# Altium PCB 水下机器人电调控制板2020.PcbDoc
Units mil, origin at the board's own origin, x right, y up, seen from the top; angles counter-clockwise.
Board outline 3149.61 x 2874.02 mil, 4 copper layers (Top Layer, AGND, SIGNAL, Bottom Layer), stack 23.756 mil thick; 78 components, 83 nets, 357 pads, 453 vias.
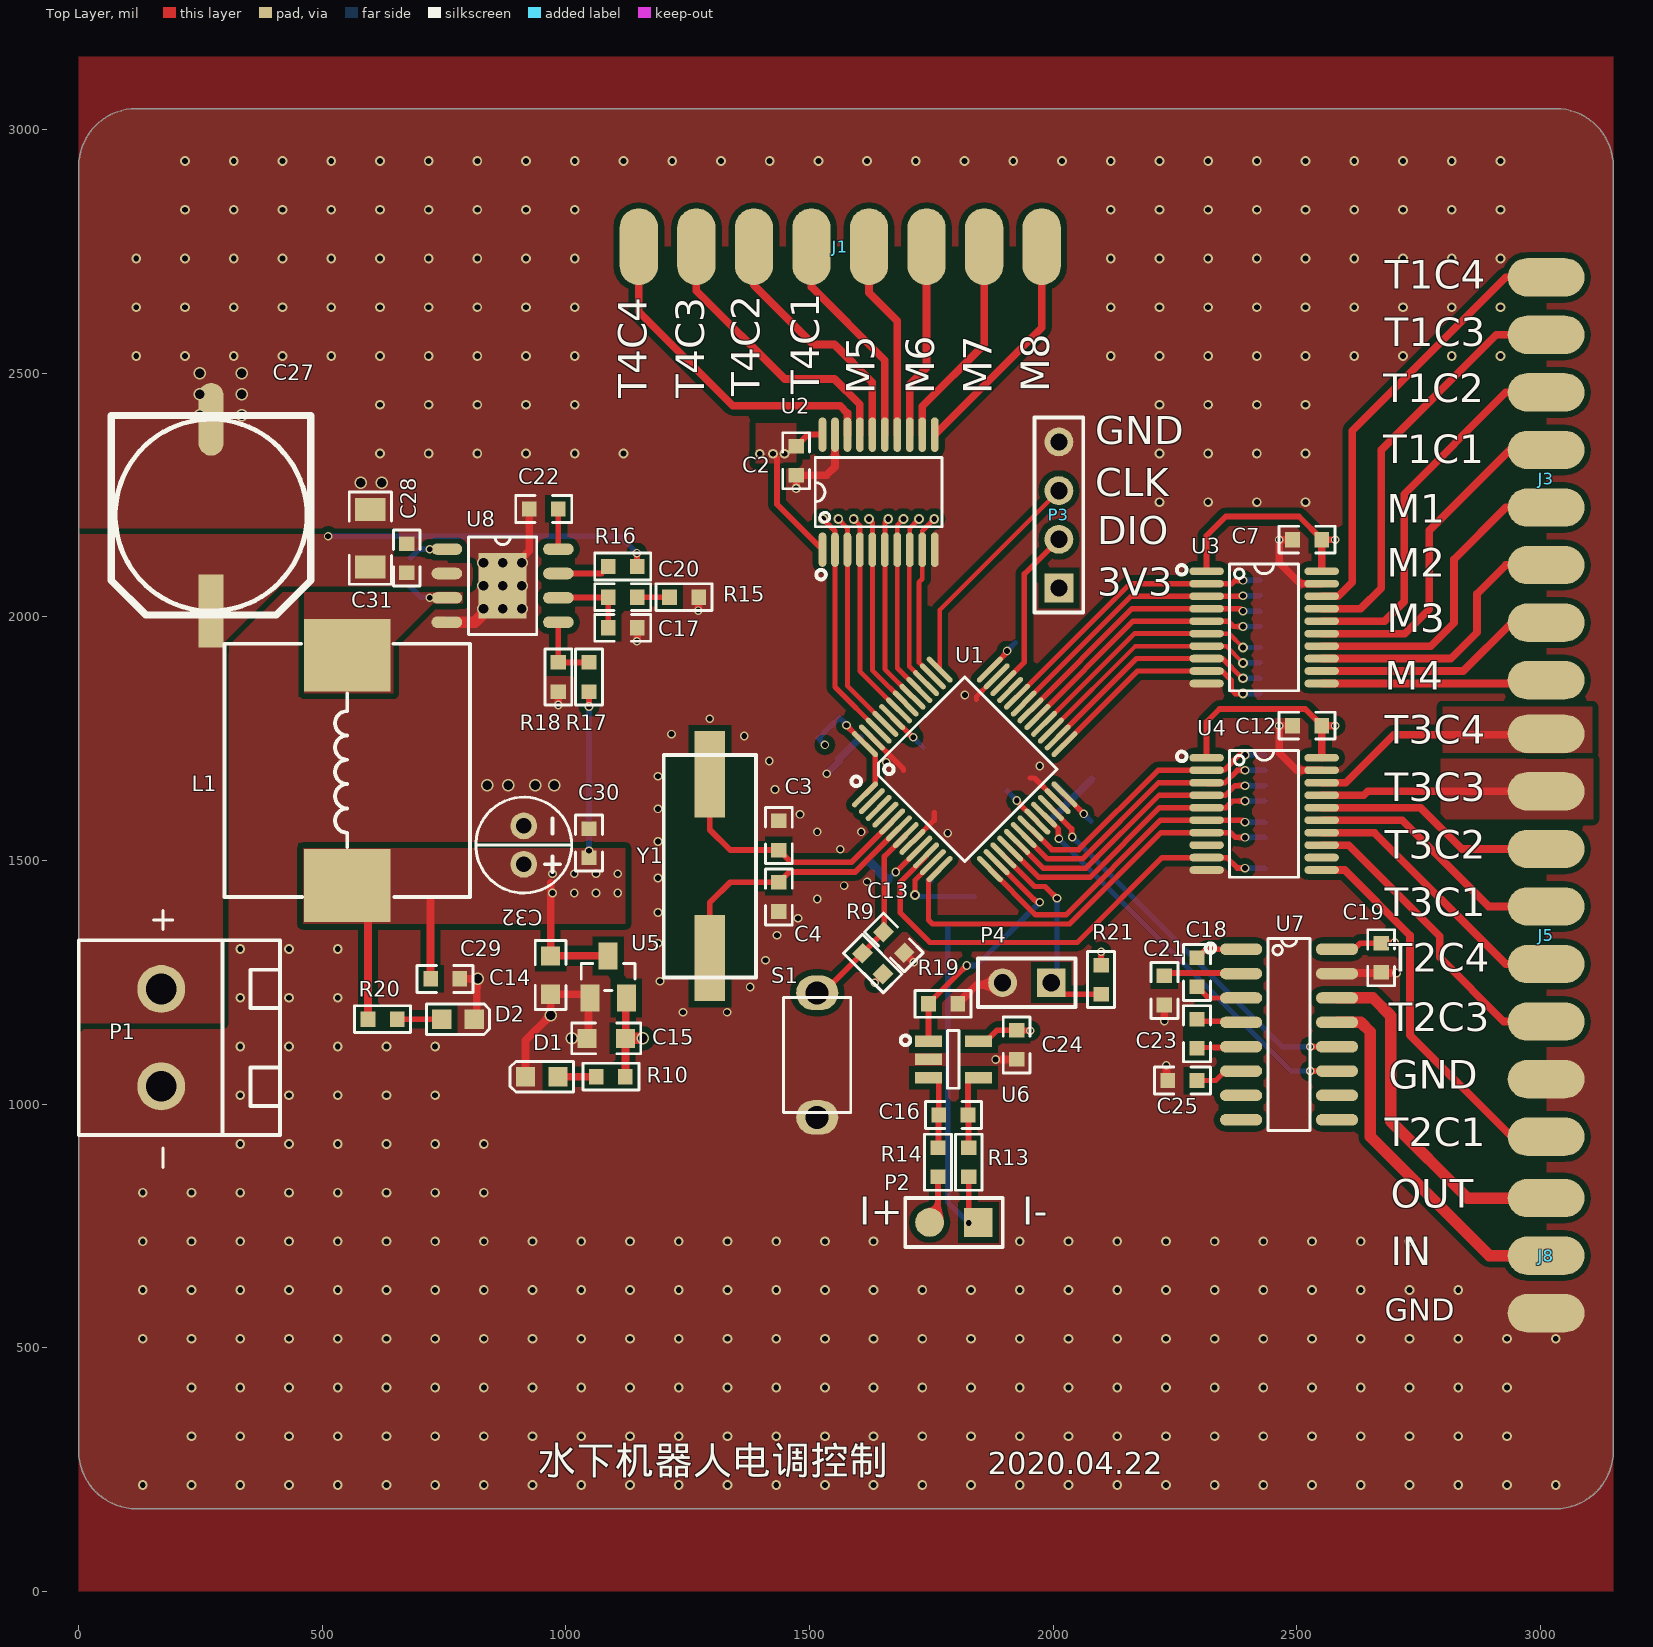
[diagram p0: Top Layer view]
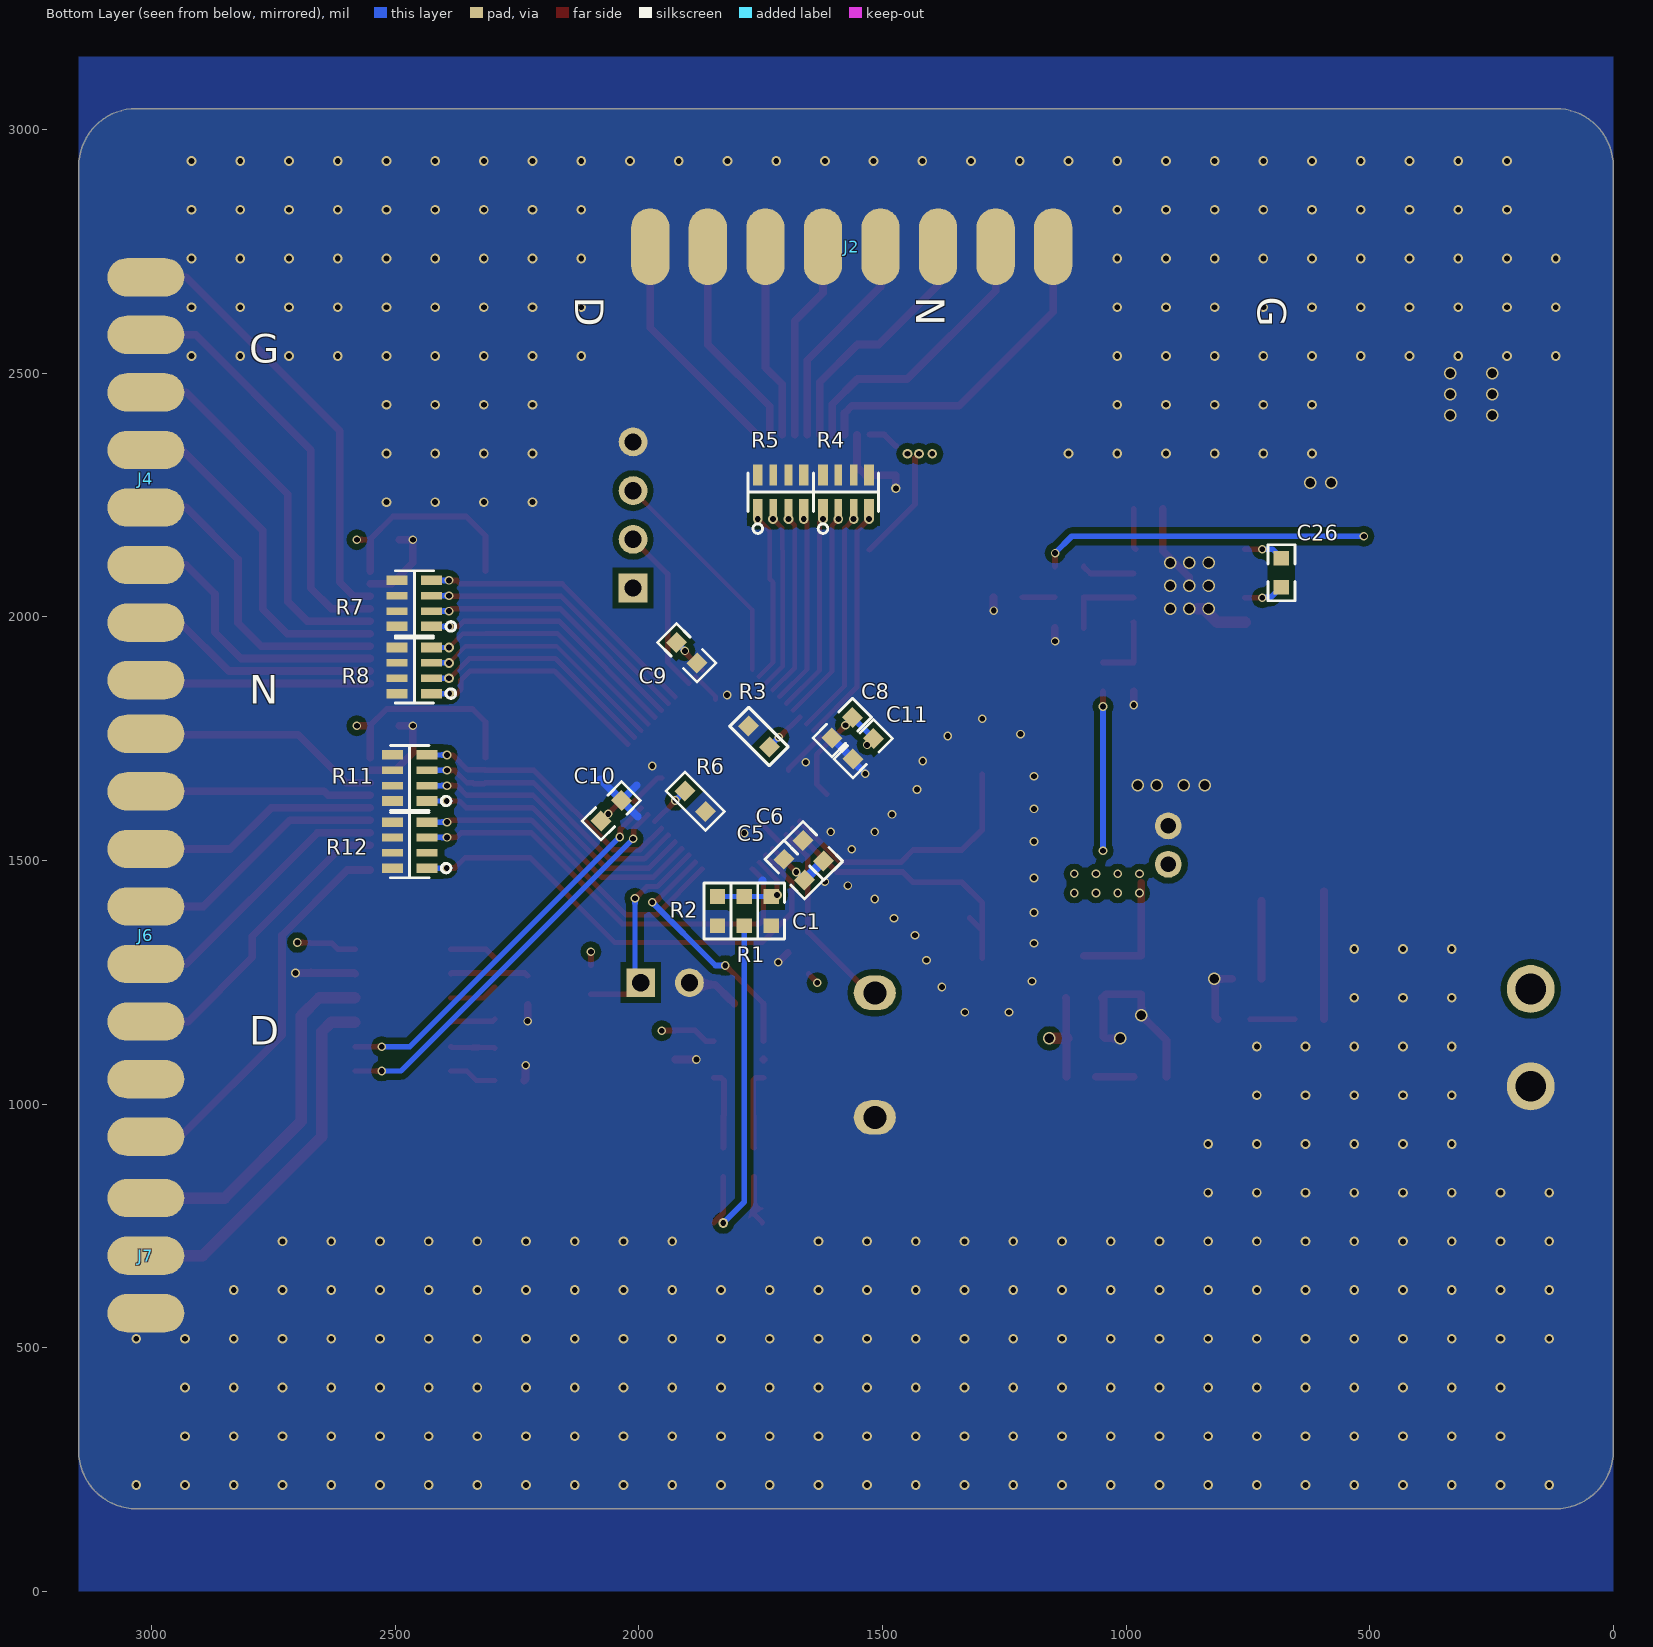
[diagram p1: Bottom Layer view, seen from below]
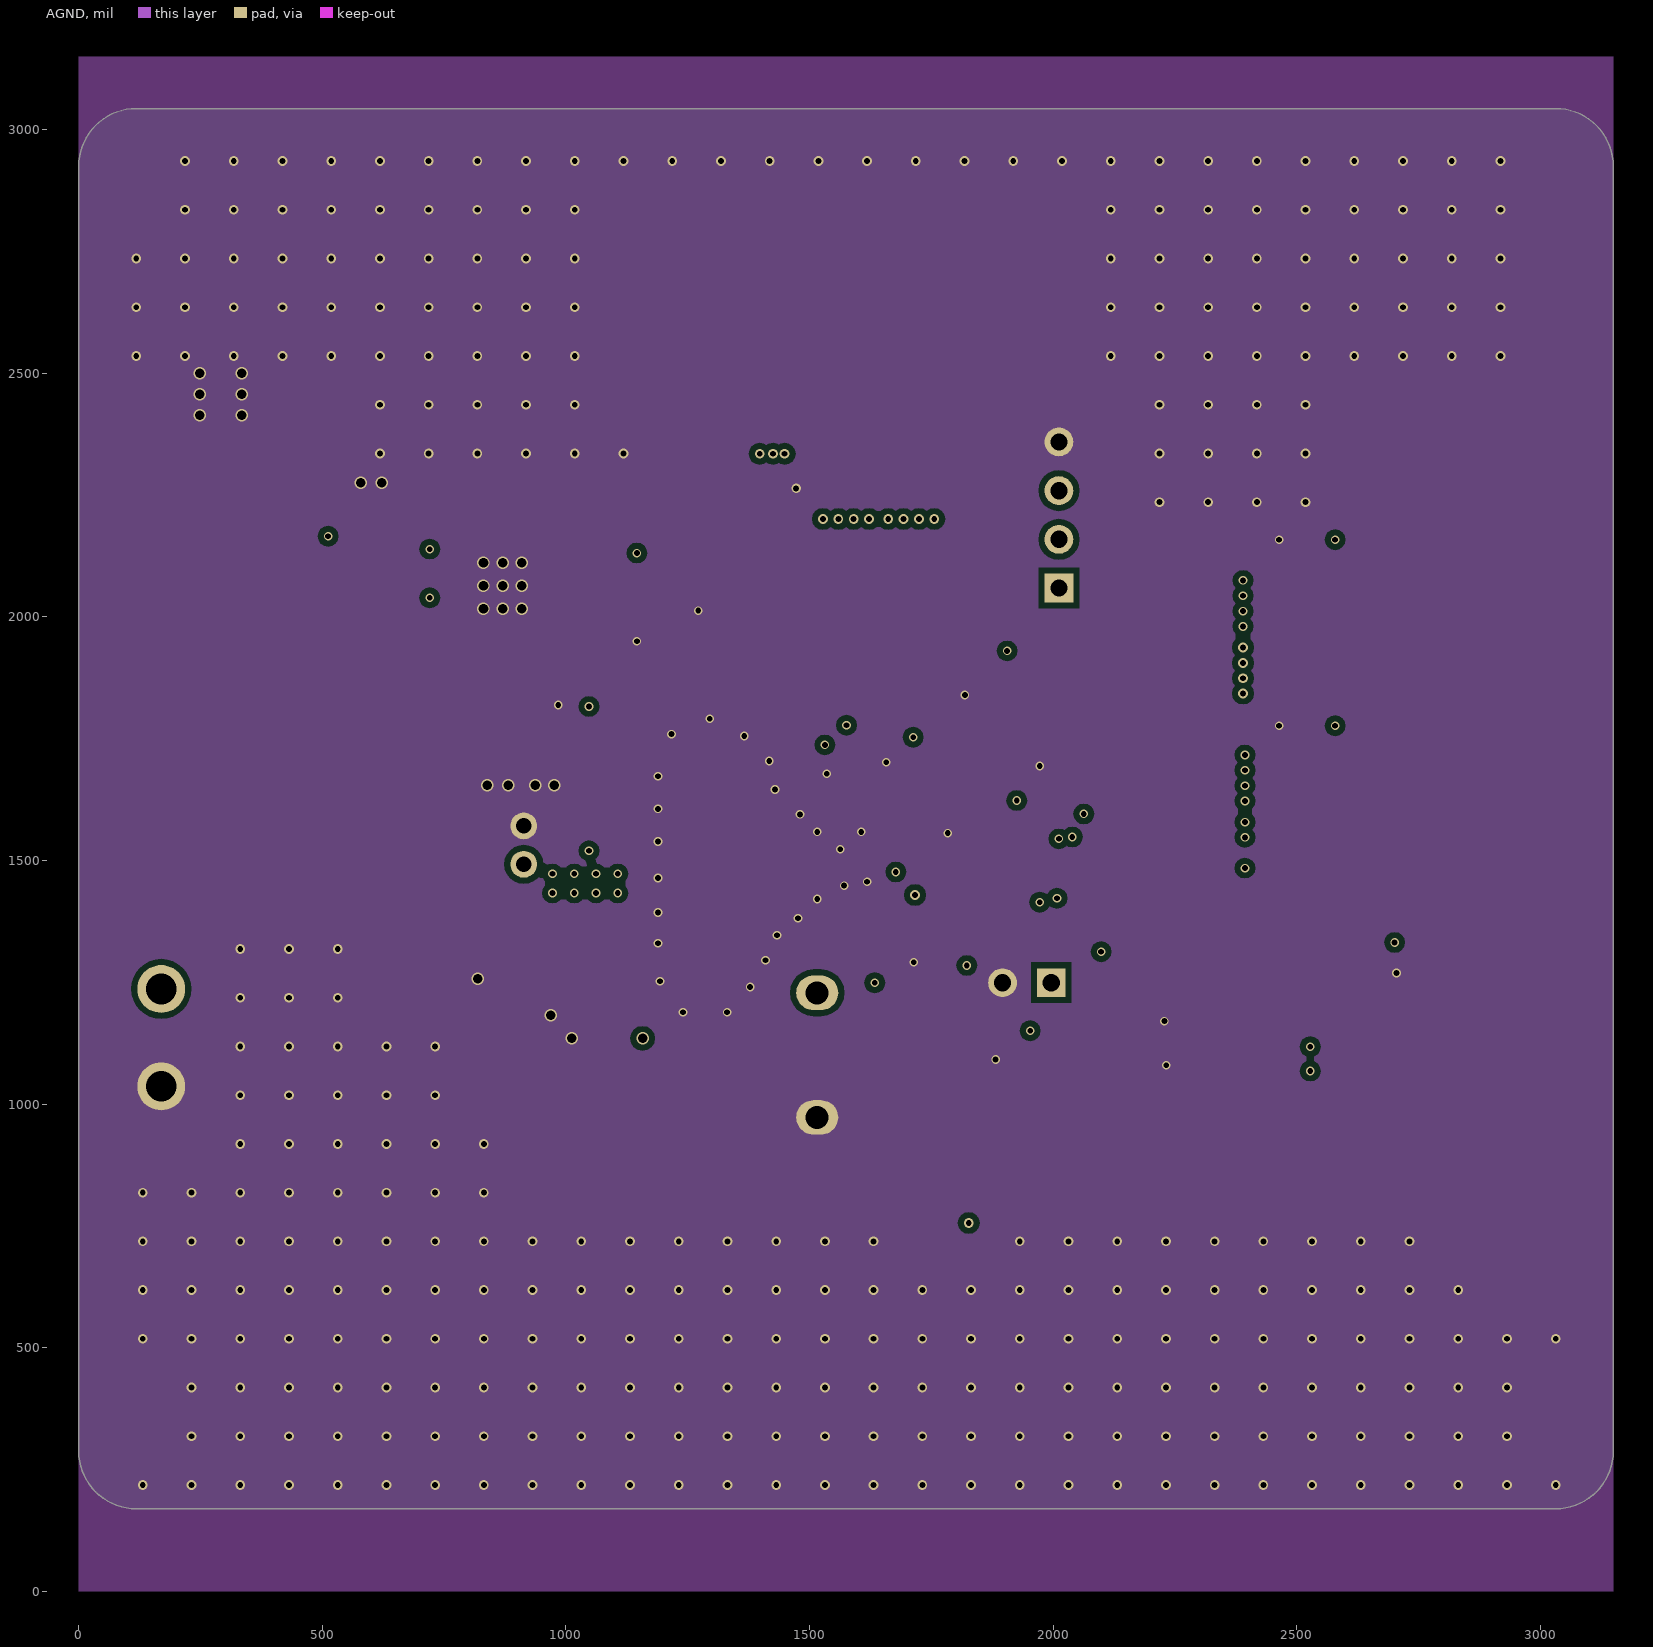
[diagram p2: AGND]
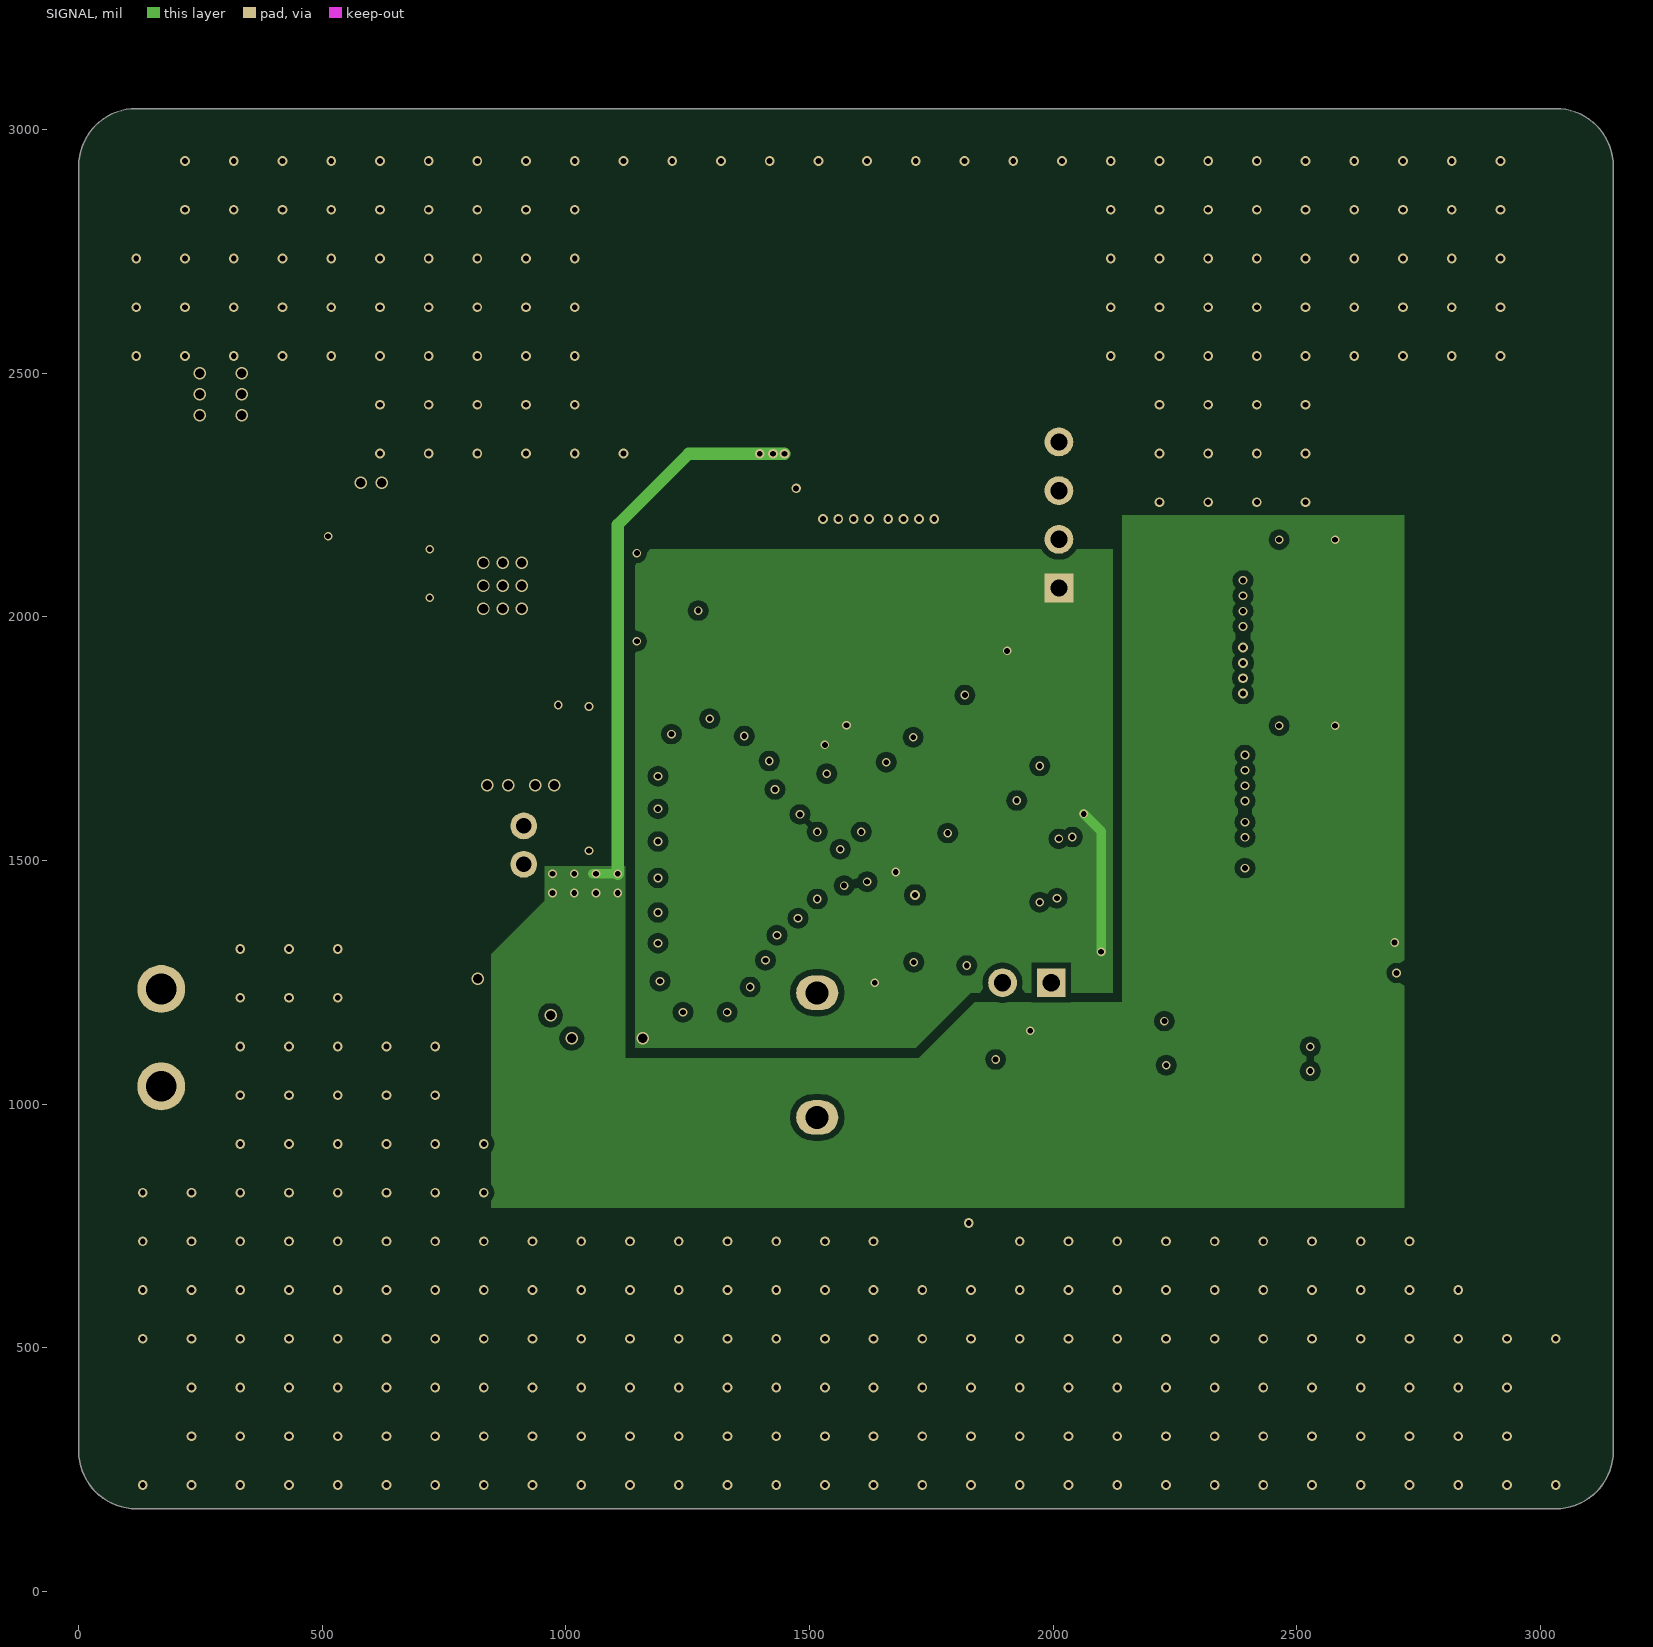
[diagram p3: SIGNAL]

## Layer stack, top to bottom
Top Solder: solder mask 0.4, Solder Resist, Dk 3.5
Top Layer: signal copper 1.4
Dielectric 2: prepreg 2.8, PP-006, Dk 4.1
AGND: signal copper 1.3779
Dielectric 1: dielectric 12.6, FR-4, Dk 4.8
SIGNAL: signal copper 1.3779
Dielectric 3: prepreg 2.8, PP-006, Dk 4.1
Bottom Layer: signal copper 1.4
Bottom Solder: solder mask 0.4, Solder Resist, Dk 3.5

## Board outline
0,287.4 ccw(c118.11,287.4) 118.11,169.29 3031.5,169.29 ccw(c3031.5,287.4) 3149.61,287.4 3149.61,2925.2 ccw(c3031.5,2925.2) 3031.5,3043.31 118.11,3043.31 ccw(c118.11,2925.2) 0,2925.2

## Design rules (kind name [scope] priority, off if disabled: settings)
Clearance POLYGON [InPolygon] p1: gap=12 ignorepadtopadclearanceinfootprint=TRUE
Clearance [All] p2: gap=7 ignorepadtopadclearanceinfootprint=TRUE
ComponentClearance [All] p1: gap=0 collisioncheckmode=3 verticalgap=0 showdistances=FALSE
DiffPairsRouting DiffPair_90OMDiffPairsRouting [InDifferentialPair('DifferentialPair_USB')] p1: maxlimit=6 minlimit=6 mostfreqgap=6 toplayer_minwidth=10 toplayer_maxwidth=10 toplayer_prefwidth=10 midlayer1_minwidth=10 midlayer1_maxwidth=10 midlayer1_prefwidth=10 midlayer2_minwidth=10 midlayer2_maxwidth=10 midlayer2_prefwidth=10 bottomlayer_minwidth=10 bottomlayer_maxwidth=10 bottomlayer_prefwidth=10 maxuncoupledlength=500
MatchedLengths DiffPair_MatchedLengths [InDifferentialPair ('DifferentialPair_USB')] p1: tolerance=1000 checknetsindiffpair=TRUE checkdiffpairvsdiffpair=FALSE checkxsignals=FALSE checkothers=FALSE
MatchedLengths DiffPair_MatchedLengths_1 [All] p2: tolerance=1000 checknetsindiffpair=FALSE checkdiffpairvsdiffpair=TRUE checkxsignals=TRUE checkothers=TRUE
MatchedLengths DiffPair_90OMMatchedLengths [All] p3: tolerance=1000 checknetsindiffpair=TRUE checkdiffpairvsdiffpair=FALSE checkxsignals=FALSE checkothers=FALSE
PolygonConnect [InNet('AGND')] p1: thpad.connectstyle=Relief thpad.reliefconductorwidth=19.68 thpad.reliefentries=4 thpad.polygonreliefangle="90 Angle" thpad.airgapwidth=10 smdpad.connectstyle=Relief smdpad.reliefconductorwidth=19.68 smdpad.reliefentries=4 smdpad.polygonreliefangle="90 Angle" smdpad.airgapwidth=10 via.connectstyle=Direct via.reliefconductorwidth=15.75 via.reliefentries=4 via.polygonreliefangle="90 Angle" via.airgapwidth=10
PolygonConnect PolygonGND [All] p2: connectstyle=Direct reliefconductorwidth=10 reliefentries=4 polygonreliefangle="90 Angle" airgapwidth=10
RoutingVias [All] p1: holewidth=15.75 width=21.65 viastyle="Through Hole" minholewidth=11.81 minwidth=11.81 maxholewidth=27.56 maxwidth=29.53
SilkToSilkClearance [All] p1: silktosilkclearance=0
SilkToSolderMaskClearance [IsPad] p1: minsilkscreentomaskgap=0 clearancetoexposedcopper=TRUE
SolderMaskExpansion [All] p1: expansion=4
Width [All] p1: maxlimit=100 minlimit=7 preferedwidth=15.75
26 further rules are at their usual default settings.

## Components (designator, comment, footprint, x,y, rotation, side; value= is the part's Value field where it differs from the comment)
C1 "0603C" 0603C 1728.35,1396.06 r90 bottom
C2 "0603C" 0603C 1472.44,2320.47 r90 top
C3 "0603C" 0603C 1437.01,1551.18 r90 top
C4 "0603C" 0603C 1437.01,1425.2 r270 top
C5 "0603C" 0603C 1681.1,1481.3 r225 bottom
C6 "0603C" 0603C 1641.73,1519.69 r225 bottom
C7 "0603C" 0603C 2521.26,2158.46 r0 top
C8 "0603C" 0603C 1582.68,1772.64 r315 bottom
C9 "0603C" 0603C 1901.57,1926.18 r225 bottom
C10 "0603C" 0603C 2056.59,1601.87 r135 bottom
C11 "0603C" 0603C 1539.37,1729.33 r315 bottom
C12 "0603C" 0603C 2521.26,1776.57 r0 top
C13 "0603C" 0603C 1673.23,1331.69 r135 top
C14 "0805C" 0805C 968.5,1264.76 r90 top
C15 "0805C" 0805C 1082.68,1134.84 r0 top
C16 "0603C" 0603C 1795.28,977.36 r0 top
C17 "0603C" 0603C 1116.54,1977.36 r180 top
C18 "0603C" 0603C 2295.28,1270.28 r90 top
C19 "0603C" 0603C 2673.23,1300.2 r270 top
C20 "0603C" 0603C 1116.54,2040.35 r180 top
C21 "0603C" 0603C 2228.35,1233.27 r90 top
C22 "0603C" 0603C 954.33,2221.46 r180 top
C23 "0603C" 0603C 2295.28,1144.29 r90 top
C24 "0603C" 0603C 1925.2,1121.46 r90 top
C25 "0603C" 0603C 2265.35,1048.23 r0 top
C26 "0603C" 0603C 681.1,2090.55 r90 bottom
C27 "10*10贴片电解电容" CAP-10*10.2 271.65,2208.66 r270 top
C28 "0603C" 0603C 673.23,2120.47 r270 top
C29 "0603C" 0603C 751.97,1256.89 r180 top
C30 "0603C" 0603C 1047.24,1535.43 r270 top
C31 "1206C" 1206C 598.43,2161.42 r90 top
C32 "1206C" 固态电容5*9 913.39,1531.5 r270 top
D1 "0603D" 0603D 950.39,1056.1 r180 top
D2 "0603D" 0603D 778.35,1174.21 r0 top
J1 "PORT8" PORT8#1 1149.61,2759.84 r90 top
J2 "PORT8" PORT8#2 1976.38,2759.84 r90 bottom
J3 "PORT8" PORT8#1 3011.81,2696.85 r0 top
J4 "PORT8" PORT8#2 3011.81,2696.85 r180 bottom
J5 "PORT8" PORT8#1 3011.81,1759.84 r0 top
J6 "PORT8" PORT8#2 3011.81,1759.84 r180 bottom
J7 "PORT3" PORT3#1 3011.81,688.98 r180 bottom
J8 "PORT3" PORT3#2 3011.81,688.98 r0 top
L1 "1265L" 1265L 551.18,1921.26 r270 top
P1 "Header 2" DB129-2 169.29,1236.22 r270 top
P2 "Header 2" HDR1X2#1 1846.46,756.89 r180 top
P3 "Header 4" HDR1X4 2011.81,2059.06 r90 top
P4 "Header 2" HDR1X2#2 1996.06,1249.02 r180 top
R1 "4532" 0603R 1783.46,1396.06 r90 bottom
R2 "502" 0603R 1838.58,1396.06 r270 bottom
R3 "0603R" 0603R 1753.44,1754.43 r225 bottom
R4 "排阻" 0603RA 1574.8,2255.91 r180 bottom
R5 "排阻" 0603RA 1708.66,2255.91 r180 bottom
R6 "0603R" 0603R 1884.35,1621.56 r45 bottom
R7 "排阻" 0603RA 2460.63,2027.56 r90 bottom
R8 "排阻" 0603RA 2460.63,1889.76 r90 bottom
R9 "0603R" 0603R 1629.92,1288.39 r315 top
R10 "0603R" 0603R 1092.13,1056.1 r180 top
R11 "排阻" 0603RA 2470.47,1669.29 r90 bottom
R12 "排阻" 0603RA 2470.47,1531.5 r90 bottom
R13 "0603R" 0603R 1826.77,880.51 r270 top
R14 "0603R" 0603R 1763.78,880.51 r270 top
R15 "0603R" 0603R 1242.52,2040.35 r0 top
R16 "0603R" 0603R 1116.54,2103.35 r0 top
R17 "0603R" 0603R 1047.24,1876.57 r270 top
R18 "0603R" 0603R 984.25,1876.57 r90 top
R19 "0603R" 0603R 1774.02,1205.71 r180 top
R20 "0603R" 0603R 623.62,1174.21 r0 top
R21 "0603R" 0603R 2098.43,1255.31 r90 top
S1 "SW-PB" "按键 3x6" 1515.75,1228.35 r270 top
U1 "STM32F103C8T6" QFP48 1818.5,1687.09 r45 top
U2 "74HC245" TSSOP20-OR65-4R40 1641.73,2255.91 r0 top
U3 "74HC245" TSSOP20-OR65-4R40 2433.07,1978.35 r270 top
U4 "74HC245" TSSOP20-OR65-4R40 2433.07,1595.47 r270 top
U5 "662k" SOT23-3 1086.61,1260.83 r0 top
U6 "INA138" SOT23-5 1795.28,1091.54 r270 top
U7 "MAX232" SOP16 2484.25,1142.72 r270 top
U8 "TD1519" SOP8-PAD 870.08,2063.98 r270 top
Y1 "XTAL_5032" XTAL贴片 1295.28,1299.61 r90 top

## Footprints (in the part's own frame and the unit in brackets; to place one, negate y for a bottom-side part, rotate by r counter-clockwise, add the part's x,y. Pads: shape width x height; smd on the part's side, far side on the other; paste and mask are expansions set on the pad)
0603C [mm]
  rect 0.76x0.8 smd: 1(-0.76,0) 2(0.76,0)
  silkscreen extent -1.46,-0.7 1.46,0.7
0603D [mm]
  rect 1x1 smd: 1(-0.85,0) 2(0.85,0)
  silkscreen extent -1.65,-0.8 1.65,0.8
0603R [mm]
  rect 0.76x0.8 smd: 1(-0.76,0) 2(0.76,0)
  silkscreen extent -1.46,-0.7 1.46,0.7
0603RA [mm]
  rect 0.5x1.1 smd: 1(-1.2,-0.9) 4(1.2,-0.9) 5(1.2,0.9) 8(-1.2,0.9)
  rect 0.4x1.1 smd: 2(-0.4,-0.9) 3(0.4,-0.9) 6(0.4,0.9) 7(-0.4,0.9)
  silkscreen extent -1.7,-2.15 1.7,1
0805C [mm]
  rect 1x1 smd: 1(-1,0) 2(1,0)
  silkscreen extent -1.8,-0.8 1.8,0.8
1206C [mm]
  rect 1.2x1.6 smd: 1(-1.5,0) 2(1.5,0)
  silkscreen extent -2.4,-1.1 2.4,1.1
1265L [mm]
  rect 3.8x4.5 smd: 1(0,0) 2(12,0)
  silkscreen extent -0.6,-6.4 12.6,6.4
CAP-10*10.2 [mm] "贴片电解电容，10*10.5"
  rect 3.8x1.3 smd: 1(5,0)
  oval 3.8x1.3 smd: 2(-5,0)
  silkscreen extent -5.2,-5.2 5.2,5.2
DB129-2 [mm]
  round 2.5 hole 1.6 mask+0.1: 1(0,0) 2(5.08,0)
  silkscreen extent -2.54,-4.3 7.62,6.2
HDR1X2#1 [mm] "Connector; Header; 2 Position"
  rect 1.5x1.5 smd: 1(0,0)
  round 1.5 smd: 2(2.54,0)
  silkscreen extent -1.27,-1.27 3.81,1.27
HDR1X2#2 [mm] "Connector; Header; 2 Position"
  rect 1.5x1.5 hole 0.9: 1(0,0)
  round 1.5 hole 0.9: 2(2.54,0)
  silkscreen extent -1.27,-1.27 3.81,1.27
HDR1X4 [mm] "Connector; Header; 4 Position"
  rect 1.5x1.5 hole 0.9: 1(0,0)
  round 1.5 hole 0.9: 2(2.54,0) 3(5.08,0) 4(7.62,0)
  silkscreen extent -1.27,-1.27 8.89,1.27
PORT3#1 [mm]
  oval 4x2 smd mask+0: 1(0,3) 2(0,0) 3(0,-3)
PORT3#2 [mm]
  oval 4x2 smd mask+0.1: 1(0,3) 2(0,0) 3(0,-3)
PORT8#1 [mm]
  oval 4x2 smd mask+0.1: 1(0,0) 2(0,-3) 3(0,-6) 4(0,-9) 5(0,-12) 6(0,-15) 7(0,-18) 8(0,-21)
PORT8#2 [mm]
  oval 4x2 smd mask+0: 1(0,0) 2(0,-3) 3(0,-6) 4(0,-9) 5(0,-12) 6(0,-15) 7(0,-18) 8(0,-21)
QFP48 [mm]
  oval 1.8x0.28 smd: 1(-4.6,2.75) 2(-4.6,2.25) 3(-4.6,1.75) 4(-4.6,1.25) 5(-4.6,0.75) 6(-4.6,0.25) 7(-4.6,-0.25) 8(-4.6,-0.75) 9(-4.6,-1.25) 10(-4.6,-1.75) 11(-4.6,-2.25) 12(-4.6,-2.75) 25(4.6,-2.75) 26(4.6,-2.25) 27(4.6,-1.75) 28(4.6,-1.25) 29(4.6,-0.75) 30(4.6,-0.25) 31(4.6,0.25) 32(4.6,0.75) 33(4.6,1.25) 34(4.6,1.75) 35(4.6,2.25) 36(4.6,2.75)
  oval 0.28x1.8 smd: 13(-2.75,-4.6) 14(-2.25,-4.6) 15(-1.75,-4.6) 16(-1.25,-4.6) 17(-0.75,-4.6) 18(-0.25,-4.6) 19(0.25,-4.6) 20(0.75,-4.6) 21(1.25,-4.6) 22(1.75,-4.6) 23(2.25,-4.6) 24(2.75,-4.6) 37(2.75,4.6) 38(2.25,4.6) 39(1.75,4.6) 40(1.25,4.6) 41(0.75,4.6) 42(0.25,4.6) 43(-0.25,4.6) 44(-0.75,4.6) 45(-1.25,4.6) 46(-1.75,4.6) 47(-2.25,4.6) 48(-2.75,4.6)
  silkscreen extent -4.69,-3.4 3.4,3.81
SOP8-PAD [mm]
  oval 0.6x1.6 smd: 1(-1.905,-2.908) 2(-0.635,-2.908) 3(0.635,-2.908) 4(1.905,-2.908) 5(1.905,2.908) 6(0.635,2.908) 7(-0.635,2.908) 8(-1.905,2.908)
  rect 3.4x2.5 smd: 9(0,0)
  silkscreen extent -2.54,-1.78 2.54,1.78
SOP16 [mm]
  oval 0.6x2.2 smd: 1(-4.445,-2.5) 2(-3.175,-2.5) 3(-1.905,-2.5) 4(-0.635,-2.5) 5(0.635,-2.5) 6(1.905,-2.5) 7(3.175,-2.5) 8(4.445,-2.5) 9(4.445,2.5) 10(3.175,2.5) 11(1.905,2.5) 12(0.635,2.5) 13(-0.635,2.5) 14(-1.905,2.5) 15(-3.175,2.5) 16(-4.445,2.5)
  silkscreen extent -5,-4.35 5,1.1
SOT23-3 [mm]
  rect 1x1.4 smd: 1(-0.95,-1.1) 2(0.95,-1.1) 3(0,1.1)
  silkscreen extent -1.4,-0.7 1.4,0.7
SOT23-5 [mm]
  rect 0.6x1.4 smd: 1(-0.95,-1.3) 2(0,-1.3) 3(0.95,-1.3) 4(0.95,1.3) 5(-0.95,1.3)
  silkscreen extent -1.5,-2.75 1.5,0.3
TSSOP20-OR65-4R40 [mm]
  oval 0.4x1.8 smd: 1(-2.925,-3) 2(-2.275,-3) 3(-1.625,-3) 4(-0.975,-3) 5(-0.325,-3) 6(0.325,-3) 7(0.975,-3) 8(1.625,-3) 9(2.275,-3) 10(2.925,-3) 11(2.925,3) 12(2.275,3) 13(1.625,3) 14(0.975,3) 15(0.325,3) 16(-0.325,3) 17(-0.975,3) 18(-1.625,3) 19(-2.275,3) 20(-2.925,3)
  silkscreen extent -3.3,-4.55 3.3,1.8
XTAL贴片 [mm]
  rect 4.5x1.6 smd: 1(0,0) 2(9.59,0)
  silkscreen extent -1,-2.4 10.6,2.4
固态电容5*9 [mm]
  round 1.4 hole 0.8 mask+0.1: 1(-1,0) 2(1,0)
  silkscreen extent -2.5,-2.5 2.5,2.5
"按键 3x6" [mm]
  oval 1.8x2.2 hole 1.2: 1(0,0) 2(6.5,0)
  silkscreen extent 0.25,-1.75 6.25,1.75

## Part data
P1 P2 P4: "Header, 2-Pin", LatestRevisionDate=17-Jul-2002, LatestRevisionNote="Re-released for DXP Platform.", Publisher="Altium Limited"
P3: "Header, 4-Pin", LatestRevisionDate=17-Jul-2002, LatestRevisionNote="Re-released for DXP Platform.", Publisher="Altium Limited"
R1 R2: library part 0603R
S1: "Switch", LatestRevisionDate=17-Jul-2002, LatestRevisionNote="Re-released for DXP Platform.", PackageDescription="Switch; 2 Leads", PackageReference=SPST-2, Published=24-Mar-1999, Publisher="Altium Limited"

## Via types
v1: diameter 20, hole 12, Top Layer to Bottom Layer, 343 vias
v2: diameter 17.72, hole 11.81, Top Layer to Bottom Layer, 85 vias
v3: diameter 25.59, hole 19.68, Top Layer to Bottom Layer, 25 vias

## Nets (pads, with @x,y where several pads share a name; then routed paths per layer and width w, separated by ;. In a path a pad name is that pad's centre, name@x,y a point inside that pad or via, vN(x,y) a via of type N, cw(c..) or ccw(c..) an arc to the next point about the centre after c; other vN are vias at no path point)
3V3: C5.2 C6.2 C8.1 C9.1 C10.1 C11.1 C15.2 P3.1 R9.2 R10.1 R21.2 U1.1 U1.9 U1.24 U1.36 U1.48 U5.2 | length 1127.4
  Top Layer w11.02: v2(1575.76,1777.43) 1575.76,1776.72 U1.48 1635.04,1717.44 1635.04,1656.75 U1.1 ; v2@1677.27,1476.27 U1.9 ; U1.36 1904.23,1925.94 1904.23,1928.84 v2(1905.51,1930.12) ; U1.24 2062.99,1595.72 v2(2062.99,1595.47)
  Top Layer w11.81: v2(1633.86,1249.02) 1633.86,1249.51 1651.08,1266.73 R9.2 ; R21.2 v2(2098.43,1312.8)
  Top Layer w15.75: R10.1 C15.2 1123.03,1135.83 1123.03,1216.54 U5.2
  Top Layer w23.62: C15.2 v3(1157.48,1134.84)
  SIGNAL w19.68: v2(2062.99,1595.47) 2098.43,1560.04 v2(2098.43,1312.8)
  Bottom Layer w11.02: v2(1531.5,1737.2) C11.1 C8.1 1575.76,1779.55 v2(1575.76,1777.43) ; C5.2 1676.18,1476.38 v2(1677.17,1476.38) ; v2(1905.51,1930.12) C9.1 ; v2(2062.99,1595.47) C10.1
  Bottom Layer w19.68: C6.2 1621.56,1498.53 C5.2
5V_MCU: C2.2 C7.2 C12.2 C14.2 C19.1 C24.2 C29.2 C30.2 C32.2 L1.2 R17.2 R20.1 U2.1 U2.20 U3.1 U3.20 U4.1 U4.20 U5.3 U6.5 U7.16 | length 3587.1
  Top Layer w11.81: v2(1047.24,1815.94) R17.2 ; 1433.07,2326.77 1433.07,2231.3 U2.1 ; U6.5 1862.2,1128.94 1884.65,1151.38 C24.2 1925.59,1150.98 1952.36,1150.98 v2(1952.76,1150.59) ; U4.1 2314.96,1784.45 2341.54,1811.02 2517.52,1811.02 2551.18,1777.36 C12.2 ; U3.1 2314.96,2166.34 2354.33,2205.71 2504.72,2205.71 2551.18,2159.25 C7.2 v2(2578.74,2158.46) ; U7.16 2617.37,1317.72 2629.77,1330.12 C19.1 2674.02,1330.91 2700,1330.91 v2(2700.79,1331.69)
  Top Layer w12: C2.2 1496.06,2374.02 U2.20
  Top Layer w15.75: R20.1 L1.2@593.7,1437.01 ; C29.2 722.05,1417.32 ; 968.5,1453.74 C14.2 U5.3 ; U4.20 C12.2 v2(2578.74,1776.57) ; U3.20 C7.2
  SIGNAL w20: v2@1055.12,1472.44 v2(1061.68,1472.44) v2(1106.3,1472.44)
  SIGNAL w25: v2(1106.3,1472.44) 1106.3,2188.98 1251.97,2334.65 v1(1397.64,2334.65) v1(1425.2,2334.65) v1(1448.82,2334.65)
  Bottom Layer w11.81: v2(1047.24,1519.69) v2(1047.24,1815.94)
  other v2: 972.44,1433.07 1017.06,1433.07 1061.68,1433.07 1106.3,1433.07 972.44,1472.44 1017.06,1472.44
24V: C27.1 C28.2 C31.1 P1.1 R16.2 U8.2 | length 676
  Top Layer w11.81: v2(1145.67,2130.91) 1146.06,2130.51 1146.06,2103.74 R16.2
  Bottom Layer w11.81: v2(511.81,2165.35) 1111.22,2165.35 v2(1145.67,2130.91)
24V_Test: P2.1 R1.1 R13.2 | length 730
  Top Layer w11.81: R13.2 1826.77,776.57 P2.1
  Bottom Layer w11.81: R1.1 1783.46,799.21 v1(1826.77,755.91)
232_IN3: J8.2 U7.13 | length 753.4
  Top Layer w23.62: U7.13 2631.5,1167.72 2651.18,1148.03 2651.18,933.07 2895.28,688.98 J8.2
232_OUT3: J8.1 U7.14 | length 726.1
  Top Layer w23.62: U7.14 2656.3,1217.72 2692.91,1181.1 2692.91,964.57 2850.39,807.09 J8.1
GND: C1.1 C2.1 C3.2 C4.2 C5.1 C6.1 C7.1 C8.2 C9.2 C10.2 C11.2 C12.1 C13.1 C14.1 C15.1 C17.1 C19.2 C21.1 C22.2 C24.1 C25.1 C27.2 C28.1 C29.1 C30.1 C31.2 C32.1 D1.2 D2.2 J2.1 J2.2 J2.3 J2.4 J2.5 J2.6 J2.7 J2.8 J4.1 J4.2 J4.3 J4.4 J4.5 J4.6 J4.7 J4.8 J5.7 J6.1 J6.2 J6.3 J6.4 J6.5 J6.6 J6.7 J6.8 J7.1 J7.2 J7.3 J8.3 P1.2 P3.4 P4.2 R2.2 R3.1 R4.5 R4.6 R4.7 R4.8 R5.5 R5.6 R5.7 R5.8 R6.1 R7.5 R7.6 R7.7 R7.8 R8.5 R8.6 R8.7 R8.8 R11.5 R11.6 R11.7 R11.8 R12.5 R12.6 R12.7 R12.8 R15.2 R18.1 R19.1 S1.2 U1.8 U1.23 U1.35 U1.47 U2.10 U2.19 U3.10 U3.19 U4.10 U4.19 U5.1 U6.2 U7.15 U8.4 U8.9 | length 2372.3
  Top Layer w10: 1842.52,1830.71 1842.52,1836.39 U1.35
  Top Layer w11.02: U1.47 1692.91,1687.41 1692.91,1685.04 ; U1.8 1755.91,1582.74 1755.91,1598.43 ; 1952.76,1669.29 1961.58,1669.29 U1.23
  Top Layer w15.75: C29.1 v3(818.9,1256.89) 817.01,1255.01 817.01,1179.42 D2.2 ; v3(870.08,2063.98) 870.08,2081.69 924.41,2136.02 C22.2 ; D1.2 916.93,1130.51 v3(968.5,1182.09) C14.1 1041.34,1225.39 U5.1 1046.26,1214.57 1046.26,1137.8 C15.1 v3(1011.81,1134.84) ; v2(984.25,1819.09) R18.1 ; v2(1145.67,1949.8) 1146.05,1950.18 1146.05,1976.95 C17.1 ; v2(1271.65,2012.8) 1272.03,2013.17 1272.03,2039.94 R15.2 ; v1(1472.44,2263.78) C2.1 1534.65,2290.55 1552.17,2308.07 U2.19 ; C13.1 v2(1713.87,1291.05) ; R19.1 1803.94,1206.5 1811.02,1213.58 1811.81,1213.58 1842.91,1244.69 1891.73,1244.69 P4.2 ; v2(1881.89,1091.54) C24.1 ; v2(2228.35,1170.28) C21.1 ; v2(2232.28,1079.72) 2232.66,1079.35 2232.66,1051 C25.1 ; C12.1 v2(2463.78,1776.57) 2463.78,1721.26 2500,1685.04 U4.19 ; C7.1 v2(2463.78,2158.46) 2463.78,2111.02 2506.89,2067.91 U3.19 ; U7.15 2583.96,1269 2671.95,1269 C19.2 2674.43,1269.08 v2(2704.72,1269.08)
  Top Layer w23.62: U8.4 812.8,1988.98 840.55,2016.73 U8.9@854.33,2016.73
  Bottom Layer w15.75: v2(1535.43,1678.15) 1560.53,1703.24 C11.2 ; C11.2@1560.95,1708.17 C11.2 ; C8.2 C11.2 ; 1745.57,1459.15 1746.06,1458.66 ; 2002.46,1590.06 C10.2 ; 2004.43,1654.04 C10.2 ; 2079.23,1666.83 C10.2
  other v1: 131.5,218.11 231.5,218.11 331.5,218.11 431.5,218.11 531.5,218.11 631.5,218.11 731.5,218.11 831.5,218.11 931.5,218.11 1031.5,218.11 1131.5,218.11 1231.5,218.11 1331.5,218.11 1431.5,218.11 1531.5,218.11 1631.5,218.11 1731.5,218.11 1831.5,218.11 1931.5,218.11 2031.5,218.11 2131.5,218.11 2231.5,218.11 2331.5,218.11 2431.5,218.11 2531.5,218.11 2631.5,218.11 2731.5,218.11 2831.5,218.11 2931.5,218.11 3031.5,218.11 231.5,318.11 331.5,318.11 431.5,318.11 531.5,318.11 631.5,318.11 731.5,318.11 831.5,318.11 931.5,318.11 1031.5,318.11 1131.5,318.11 1231.5,318.11 1331.5,318.11 1431.5,318.11 1531.5,318.11 1631.5,318.11 1731.5,318.11 1831.5,318.11 1931.5,318.11 2031.5,318.11 2131.5,318.11 2231.5,318.11 2331.5,318.11 2431.5,318.11 2531.5,318.11 2631.5,318.11 2731.5,318.11 2831.5,318.11 2931.5,318.11 231.5,418.11 331.5,418.11 431.5,418.11 531.5,418.11 631.5,418.11 731.5,418.11 831.5,418.11 931.5,418.11 1031.5,418.11 1131.5,418.11 1231.5,418.11 1331.5,418.11 1431.5,418.11 1531.5,418.11 1631.5,418.11 1731.5,418.11 1831.5,418.11 1931.5,418.11 2031.5,418.11 2131.5,418.11 2231.5,418.11 2331.5,418.11 2431.5,418.11 2531.5,418.11 2631.5,418.11 2731.5,418.11 2831.5,418.11 2931.5,418.11 131.5,518.11 231.5,518.11 331.5,518.11 431.5,518.11 531.5,518.11 631.5,518.11 731.5,518.11 831.5,518.11 931.5,518.11 1031.5,518.11 1131.5,518.11 1231.5,518.11 1331.5,518.11 1431.5,518.11 1531.5,518.11 1631.5,518.11 1731.5,518.11 1831.5,518.11 1931.5,518.11 2031.5,518.11 2131.5,518.11 2231.5,518.11 2331.5,518.11 2431.5,518.11 2531.5,518.11 2631.5,518.11 2731.5,518.11 2831.5,518.11 2931.5,518.11 3031.5,518.11 131.5,618.11 231.5,618.11 331.5,618.11 431.5,618.11 531.5,618.11 631.5,618.11 731.5,618.11 831.5,618.11 931.5,618.11 1031.5,618.11 1131.5,618.11 1231.5,618.11 1331.5,618.11 1431.5,618.11 1531.5,618.11 1631.5,618.11 1731.5,618.11 1831.5,618.11 1931.5,618.11 2031.5,618.11 2131.5,618.11 2231.5,618.11 2331.5,618.11 2431.5,618.11 2531.5,618.11 2631.5,618.11 2731.5,618.11 2831.5,618.11 131.5,718.11 231.5,718.11 331.5,718.11 431.5,718.11 531.5,718.11 631.5,718.11 731.5,718.11 831.5,718.11 931.5,718.11 1031.5,718.11 1131.5,718.11 1231.5,718.11 1331.5,718.11 1431.5,718.11 1531.5,718.11 1631.5,718.11 1931.5,718.11 2031.5,718.11 2131.5,718.11 2231.5,718.11 2331.5,718.11 2431.5,718.11 2531.5,718.11 2631.5,718.11 2731.5,718.11 131.5,818.11 231.5,818.11 331.5,818.11 431.5,818.11 531.5,818.11 631.5,818.11 731.5,818.11 831.5,818.11 331.5,918.11 431.5,918.11 531.5,918.11 631.5,918.11 731.5,918.11 831.5,918.11 331.5,1018.11 431.5,1018.11 531.5,1018.11 631.5,1018.11 731.5,1018.11 331.5,1118.11 431.5,1118.11 531.5,1118.11 631.5,1118.11 731.5,1118.11 331.5,1218.11 431.5,1218.11 531.5,1218.11 331.5,1318.11 431.5,1318.11 531.5,1318.11 2218.11,2235.43 2318.11,2235.43 2418.11,2235.43 2518.11,2235.43 618.11,2335.43 718.11,2335.43 818.11,2335.43 918.11,2335.43 1018.11,2335.43 1118.11,2335.43 2218.11,2335.43 2318.11,2335.43 2418.11,2335.43 2518.11,2335.43 618.11,2435.43 718.11,2435.43 818.11,2435.43 918.11,2435.43 1018.11,2435.43 2218.11,2435.43 2318.11,2435.43 2418.11,2435.43 2518.11,2435.43 118.11,2535.43 218.11,2535.43 318.11,2535.43 418.11,2535.43 518.11,2535.43 618.11,2535.43 718.11,2535.43 818.11,2535.43 918.11,2535.43 1018.11,2535.43 2118.11,2535.43 2218.11,2535.43 2318.11,2535.43 2418.11,2535.43 2518.11,2535.43 2618.11,2535.43 2718.11,2535.43 2818.11,2535.43 2918.11,2535.43 118.11,2635.43 218.11,2635.43 318.11,2635.43 418.11,2635.43 518.11,2635.43 618.11,2635.43 718.11,2635.43 818.11,2635.43 918.11,2635.43 1018.11,2635.43 2118.11,2635.43 2218.11,2635.43 2318.11,2635.43 2418.11,2635.43 2518.11,2635.43 2618.11,2635.43 2718.11,2635.43 2818.11,2635.43 2918.11,2635.43 118.11,2735.43 218.11,2735.43 318.11,2735.43 418.11,2735.43 518.11,2735.43 618.11,2735.43 718.11,2735.43 818.11,2735.43 918.11,2735.43 1018.11,2735.43 2118.11,2735.43 2218.11,2735.43 2318.11,2735.43 2418.11,2735.43 2518.11,2735.43 2618.11,2735.43 2718.11,2735.43 2818.11,2735.43 2918.11,2735.43 218.11,2835.43 318.11,2835.43 418.11,2835.43 518.11,2835.43 618.11,2835.43 718.11,2835.43 818.11,2835.43 918.11,2835.43 1018.11,2835.43 2118.11,2835.43 2218.11,2835.43 2318.11,2835.43 2418.11,2835.43 2518.11,2835.43 2618.11,2835.43 2718.11,2835.43 2818.11,2835.43 2918.11,2835.43 218.11,2935.43 318.11,2935.43 418.11,2935.43 518.11,2935.43 618.11,2935.43 718.11,2935.43 818.11,2935.43 918.11,2935.43 1018.11,2935.43 1118.11,2935.43 1218.11,2935.43 1318.11,2935.43 1418.11,2935.43 1518.11,2935.43 1618.11,2935.43 1718.11,2935.43 1818.11,2935.43 1918.11,2935.43 2018.11,2935.43 2118.11,2935.43 2218.11,2935.43 2318.11,2935.43 2418.11,2935.43 2518.11,2935.43 2618.11,2935.43 2718.11,2935.43 2818.11,2935.43 2918.11,2935.43
  other v2: 1240.16,1188.48 1330.71,1188.48 1377.95,1240.16 1192.91,1251.97 1409.45,1295.28 1188.98,1330.21 1433.07,1346.46 1476.38,1381.39 1188.98,1393.2 1515.75,1420.76 1570.87,1448.32 1618.11,1456.2 1188.98,1464.07 1562.99,1523.13 1188.98,1538.87 1783.46,1556.1 1515.75,1558.56 1606.3,1558.56 1480.31,1594.49 1188.98,1605.8 1429.13,1645.67 1188.98,1672.73 1972.44,1693.9 1657.48,1701.77 1417.32,1704.23 1366.14,1755.41 1216.54,1759.35 1295.28,1790.84 1818.9,1839.57
  other v3: 838.58,1654.53 881.89,1654.53 937.01,1654.53 976.38,1654.53 830.71,2016.73 870.08,2016.73 909.45,2016.73 830.71,2063.98 909.45,2063.98 830.71,2111.22 870.08,2111.22 909.45,2111.22 578.74,2275.59 622.05,2275.59 248.03,2413.39 334.65,2413.39 248.03,2456.69 334.65,2456.69 248.03,2500 334.65,2500
Isen: R19.2 U1.14 U6.1 | length 514.5
  Top Layer w11.02: U1.14 1964.67,1415.65 1971.16,1415.65 v2(1972.44,1414.37)
  Top Layer w11.81: U6.1 R19.2 1744.09,1206.5 1822.05,1284.45 v2(1822.83,1284.45)
  Bottom Layer w11.81: v2(1822.83,1284.45) 1842.52,1284.45 v2(1972.44,1414.37)
M1: R8.4 U1.28 U3.6 | length 532.4
  Top Layer w9: U3.6 2361.22,1965.55 v1(2389.76,1937.01)
  Top Layer w10: U1.28 2166.56,1965.55 U3.6
  Bottom Layer w11.02: v1(2389.76,1937.01) R8.4
M1_O: J3.5 U3.14 | length 654.6
  Top Layer w15.75: U3.14 2774.61,1939.96 2822.83,1988.19 2822.83,2118.11 2929.13,2224.41 J3.5
M2: R8.3 U1.27 U3.7 | length 516.1
  Top Layer w9: U1.27 2168.8,1939.96 U3.7 2355.31,1939.96 v1(2389.76,1905.51)
  Bottom Layer w11.02: v1(2389.76,1905.51) R8.3
M2_O: J3.6 U3.13 | length 586.3
  Top Layer w15.75: U3.13 2815.94,1914.37 2870.08,1968.5 2870.08,2047.24 2929.13,2106.3 J3.6
M3: R8.2 U1.26 U3.8 | length 499.8
  Top Layer w11.02: U1.26 2171.05,1914.37 U3.8 2347.83,1914.37 2388.19,1874.02 v1(2389.76,1874.02)
  Bottom Layer w11.02: v1(2389.76,1874.02) R8.2
M3_O: J3.7 U3.12 | length 503.2
  Top Layer w15.75: U3.12 2841.54,1888.78 2940.94,1988.19 J3.7 J3.7@3010.83,1987.2
M4: R8.1 U1.25 U3.9 | length 494.6
  Top Layer w11.02: U1.25 2173.3,1888.78 U3.9 2346.77,1888.78 2365.47,1870.08 2365.47,1851.06 2374.02,1842.52 v1(2389.76,1842.52)
  Bottom Layer w11.02: v1(2389.76,1842.52) R8.1
M4_O: J3.8 U3.11 | length 463.5
  Top Layer w15.75: U3.11 2933.78,1863.19 2940.67,1870.08 J3.8
M5: R5.4 U1.41 U2.6 | length 391.1
  Top Layer w10: v1(1661.42,2200.79) 1654.53,2193.9 U2.6 1654.53,1892.83 U1.41
M5_O: J1.5 U2.14 | length 409.9
  Top Layer w15.75: J1.5 1622.05,2665.35 1680.12,2607.28 U2.14
M6: R5.3 U1.40 U2.7 | length 374.8
  Top Layer w10: v1(1692.91,2200.79) 1680.12,2187.99 U2.7 1680.12,1895.08 U1.40
M6_O: J1.6 U2.13 | length 400.1
  Top Layer w15.75: U2.13 1705.71,2477.36 1740.16,2511.81 J1.6
M7: R5.2 U1.39 U2.8 | length 359.3
  Top Layer w10: v1(1724.41,2200.79) 1705.71,2182.09 U2.8 1704.72,2136.81 1704.72,1898.31 U1.39
M7_O: J1.7 U2.12 | length 438.4
  Top Layer w15.75: U2.12 1731.3,2432.09 1858.27,2559.06 J1.7
M8: R5.1 U1.38 U2.9 | length 347.9
  Top Layer w10: U1.38 1724.41,1906.46 1724.41,2070.87 1731.3,2077.76 U2.9 1731.3,2176.18 v1(1755.91,2200.79)
M8_O: J1.8 U2.11 | length 476.7
  Top Layer w15.75: U2.11 1976.38,2593.5 J1.8
NetC1_2: C1.2 R1.2 R2.1 U1.11 | length 205.8
  Top Layer w10: v1(1716.54,1429.13) 1716.54,1459.85 U1.11
  Bottom Layer w10: v1(1716.54,1429.13) 1719.69,1425.98 R1.2 R2.1
NetC3_1: C3.1 U1.5 Y1.2 | length 550.9
  Top Layer w11.81: Y1.2 1295.28,1562.99 1337.01,1521.26 C3.1 1462.2,1496.06 1585.71,1496.06 U1.5
NetC4_1: C4.1 U1.6 Y1.1 | length 601.4
  Top Layer w11.81: Y1.1 Y1.1@1295.28,1356.3 ; Y1.1@1320.87,1381.89 Y1.1@1295.28,1356.3 ; U1.6 1593.87,1476.38 1458.27,1476.38 C4.1 1337.01,1455.12 1295.28,1413.39 Y1.1@1295.28,1356.3
NetC16_1: C16.1 R14.1 U6.3 | length 162.2
  Top Layer w11.81: U6.3 1759.45,1054.13 1765.35,1048.23 C16.1 1764.57,976.57 1764.57,911.22 R14.1
NetC16_2: C16.2 R13.1 U6.4 | length 162.2
  Top Layer w11.81: R13.1 1825.98,911.22 1825.98,976.57 C16.2 1825.2,1048.23 1831.1,1054.13 U6.4
NetC17_2: C17.2 C20.2 U8.6 | length 165.6
  Top Layer w11.81: U8.6 985.26,2039.67 1085.93,2039.67 C20.2 C17.2
NetC18_1: C18.1 U7.3 | length 99.9
  Top Layer w11.02: C18.1 2296.06,1240.35 2318.7,1217.72 U7.3
NetC18_2: C18.2 U7.1 | length 97.8
  Top Layer w11.81: C18.2 2296.06,1300.2 2313.58,1317.72 U7.1
NetC20_1: C20.1 R15.1 | length 66.1
  Top Layer w11.81: C20.1 R15.1
NetC21_2: C21.2 U7.2 | length 160.5
  Top Layer w11.81: C21.2 2234.25,1269.09 2384.45,1269.09 U7.2
NetC22_1: C22.1 U8.8 | length 84.3
  Top Layer w11.81: U8.8@980.32,2138.78 984.25,2142.72 C22.1
NetC23_1: C23.1 U7.5 | length 91.9
  Top Layer w11.02: C23.1 2296.95,1116.04 2384.15,1116.04 U7.5
NetC23_2: C23.2 U7.4 | length 93.2
  Top Layer w11.02: C23.2 2299.36,1170.13 2383.42,1170.13 U7.4
NetC25_2: C25.2 U7.6 | length 98.6
  Top Layer w11.02: C25.2 2333.73,1048.23 2353.22,1067.72 U7.6
NetC26_1: C26.1 L1.1 U8.3 | length 83.5
  Top Layer w11.81: v2(720.47,2038.98) U8.3
  Bottom Layer w11.81: C26.1 681.89,2060.63 702.41,2040.11 719.34,2040.11 v2(720.47,2038.98)
NetC26_2: C26.2 U8.1 | length 82.2
  Top Layer w11.81: v2(720.47,2138.98) U8.1
  Bottom Layer w11.81: C26.2 699.61,2138.98 v2(720.47,2138.98)
NetD1_1: D1.1 R10.2 | length 78.3
  Top Layer w15.75: D1.1 R10.2
NetD2_1: D2.1 R20.2 | length 91.3
  Top Layer w11.81: R20.2 D2.1
NetR3_2: R3.2 U1.44 | length 88
  Top Layer w11.02: U1.44 1710.89,1752.95 v2(1712.6,1752.95)
  Bottom Layer w11.02: v2(1712.6,1752.95) R3.2
NetR6_2: R6.2 U1.20 | length 88.5
  Top Layer w11.02: v2(1925.2,1623.03) 1925.2,1622.16 U1.20
  Bottom Layer w11.02: R6.2 v2(1925.2,1623.03)
NetR16_1: R16.1 U8.7 | length 108.5
  Top Layer w11.81: U8.7 1073.03,2088.98 1086.61,2102.56 R16.1
NetR17_1: R17.1 R18.2 U8.5 | length 145.6
  Top Layer w11.81: U8.5 984.25,1988.66 R18.2 R17.1
NRST: C13.2 R9.1 S1.1 U1.7 | length 407.4
  Top Layer w11.81: S1.1 1527.57,1228.35 R9.1 C13.2 C13.2@1653.54,1354.32 ; C13.2@1653.54,1352.85 C13.2@1653.54,1354.32 ; U1.7 1697.4,1551.9 1653.54,1508.04 C13.2@1653.54,1354.32
NTC_IN: P4.1 R21.1 U1.15 | length 436.8
  Top Layer w11.02: U1.15 1961.7,1446.46 1983.66,1446.46 v2(2007.87,1422.24) ; P4.1 2019.69,1225.39 R21.1
  Bottom Layer w11.02: P4.1 2007.87,1260.83 v2(2007.87,1422.24)
RX3: U1.22 U7.12 | length 799.4
  Top Layer w11.02: U1.22 2038.09,1564.94 2038.09,1549.51 v2(2039.37,1548.23) ; v2(2527.56,1117.72) U7.12
  Bottom Layer w11.02: v2(2039.37,1548.23) 2469.88,1117.72 v2(2527.56,1117.72)
SWCLK: P3.3 U1.37 | length 468.7
  Top Layer w9: U1.37 1767,2014.24 P3.3
SWDIO: P3.2 U1.34 | length 342.4
  Top Layer w11.02: U1.34 1940.94,1906.97 1940.94,2088.19 P3.2
T1C1: R7.1 U1.29 U3.5 | length 543.8
  Top Layer w11.02: U1.29 2164.31,1991.14 U3.5 2359.25,1991.14 2370.08,1980.31 v2(2389.76,1980.31)
  Bottom Layer w11.02: v2(2389.76,1980.31) R7.1
T1C1_O: J3.4 U3.15 | length 711.3
  Top Layer w15.75: U3.15 2721.46,1965.55 2771.65,2015.75 2771.65,2177.17 2937.01,2342.52 J3.4
T1C2: R7.2 U1.30 U3.4 | length 560.1
  Top Layer w11.02: U1.30 2162.06,2016.73 U3.4 2384.84,2016.73 v2(2389.76,2011.81)
  Bottom Layer w11.02: v2(2389.76,2011.81) R7.2
T1C2_O: J3.3 U3.16 | length 784.2
  Top Layer w15.75: U3.16 2680.12,1991.14 2720.47,2031.5 2720.47,2251.97 2929.13,2460.63 J3.3
T1C3: R7.3 U1.31 U3.3 | length 577.2
  Top Layer w11.02: U1.31 2159.81,2042.32 U3.3 2388.78,2042.32 v2(2389.76,2043.31)
  Bottom Layer w11.02: v2(2389.76,2043.31) R7.3
T1C3_O: J3.2 U3.17 | length 859.5
  Top Layer w15.75: U3.17 2630.91,2016.73 2673.23,2059.06 2673.23,2342.52 2909.45,2578.74 J3.2
T1C4: R7.4 U1.32 U3.2 | length 598.4
  Top Layer w11.02: U1.32 2157.56,2067.91 U3.2 2367.13,2067.91 2374.02,2074.8 v2(2389.76,2074.8)
  Bottom Layer w11.02: v2(2389.76,2074.8) R7.4
T1C4_O: J3.1 U3.18 | length 913.8
  Top Layer w15.75: U3.18 2585.32,2042.32 2614.17,2071.18 2614.17,2381.89 2929.13,2696.85 J3.1
T2C1: R12.1 U1.10 U4.9 | length 995
  Top Layer w11.02: U1.10 1739.16,1508.15 1686.02,1455.01 1686.02,1392.72 1747.05,1331.69 2049.51,1331.69 2223.73,1505.91 U4.9 2356.3,1505.91 2377.95,1484.25 v2(2393.7,1484.25)
  Bottom Layer w11.02: v2(2393.7,1484.25) R12.1
T2C1_O: J5.8 U4.11 | length 807.2
  Top Layer w15.75: U4.11 2598.43,1480.31 2732.28,1346.46 2732.28,1141.73 2940.94,933.07 J5.8
T2C3: R12.3 U1.12 U4.7 | length 890.2
  Top Layer w11.02: U1.12 1744.09,1459.57 1744.09,1377.95 1752.56,1369.49 2033.86,1369.49 2221.46,1557.09 U4.7 2364.17,1557.09 2374.02,1547.24 v2(2393.7,1547.24)
  Bottom Layer w11.02: v2(2393.7,1547.24) R12.3
T2C3_O: J5.6 U4.13 | length 636
  Top Layer w15.75: U4.13 2606.3,1531.5 2793.31,1344.49 2793.31,1301.18 2925.2,1169.29 J5.6
T2C4: R12.4 U1.13 U4.6 | length 686.1
  Top Layer w11.02: U1.13 1964.1,1388.39 2026.03,1388.39 2220.32,1582.68 U4.6 2389.76,1582.68 v2(2393.7,1578.74)
  Bottom Layer w11.02: v2(2393.7,1578.74) R12.4
T2C4_O: J5.5 U4.14 | length 572.3
  Top Layer w15.75: U4.14 2659.45,1557.09 2929.13,1287.4 J5.5
T3C1: R11.1 U1.16 U4.5 | length 612.6
  Top Layer w11.02: U1.16 1970.65,1465.35 2075.69,1465.35 2218.6,1608.27 U4.5 2354.63,1608.27 2368.41,1622.05 v2(2393.7,1622.05)
  Bottom Layer w11.02: v2(2393.7,1622.05) R11.1
T3C1_O: J5.4 U4.15 | length 534
  Top Layer w15.75: U4.15 2716.54,1582.68 2893.7,1405.51 J5.4
T3C2: R11.2 U1.17 U4.4 | length 601.8
  Top Layer w11.02: U1.17 1979.59,1484.25 2067.86,1484.25 2217.47,1633.86 U4.4 2353.5,1633.86 2373.18,1653.54 v2(2393.7,1653.54)
  Bottom Layer w11.02: v2(2393.7,1653.54) R11.2
T3C2_O: J5.3 U4.16 | length 495.7
  Top Layer w15.75: U4.16 2753.94,1608.27 2838.58,1523.62 J5.3
T3C3: R11.3 U1.18 U4.3 | length 592.7
  Top Layer w11.02: U1.18 1988.53,1503.15 2060.03,1503.15 2216.33,1659.45 U4.3 2316.93,1657.48 2338.58,1657.48 2340.55,1659.45 2352.36,1659.45 2377.95,1685.04 v2(2393.7,1685.04)
  Bottom Layer w11.02: v2(2393.7,1685.04) R11.3
T3C3_O: J5.2 U4.17 | length 463.9
  Top Layer w15.75: U4.17 2637.8,1633.86 2645.67,1641.73 J5.2
T3C4: R11.4 U1.19 U4.2 | length 580.3
  Top Layer w11.02: U1.19 1997.47,1522.05 2052.21,1522.05 2215.2,1685.04 U4.2 2315.86,1685.94 2351.3,1685.94 2381.89,1716.54 v2(2393.7,1716.54)
  Bottom Layer w11.02: v2(2393.7,1716.54) R11.4
T3C4_O: J5.1 U4.18 | length 502.2
  Top Layer w15.75: U4.18 2600.39,1659.45 2698.82,1757.87 3009.84,1757.87 J5.1
T4C1: R4.1 U1.42 U2.5 | length 409.9
  Top Layer w10: v1(1622.05,2200.79) 1628.94,2193.9 U2.5 1628.94,1890.58 U1.42
T4C1_O: J1.4 U2.15 | length 448.2
  Top Layer w15.75: J1.4 1503.94,2677.17 1654.53,2526.57 U2.15
T4C2: R4.2 U1.43 U2.4 | length 431.1
  Top Layer w10: v1(1590.55,2200.79) 1603.35,2187.99 U2.4 1603.35,1888.33 U1.43
T4C2_O: J1.3 U2.16 | length 511.9
  Top Layer w15.75: J1.3 1385.83,2681.1 1507.87,2559.06 1551.18,2559.06 1628.94,2481.3 U2.16
T4C3: R4.3 U1.45 U2.3 | length 460.4
  Top Layer w10: v1(1559.06,2200.79) 1577.76,2182.09 U2.3 1577.76,1858.24 U1.45
T4C3_O: J1.2 U2.17 | length 584.8
  Top Layer w15.75: J1.2 1267.72,2669.29 1448.82,2488.19 1551.18,2488.19 1603.35,2436.02 U2.17
T4C4: R4.4 U1.46 U2.2 | length 481.6
  Top Layer w10: v1(1527.56,2200.79) 1552.17,2176.18 U2.2 1552.17,1856 U1.46
T4C4_O: J1.1 U2.18 | length 692.3
  Top Layer w15.75: J1.1 1149.61,2625.98 1342.52,2433.07 1562.99,2433.07 1577.76,2418.31 U2.18
TX3: U1.21 U7.11 | length 830.4
  Top Layer w11.02: U1.21 2010.53,1564.66 2010.53,1545.57 v2(2011.81,1544.29) ; v2(2527.56,1067.72) U7.11
  Bottom Layer w11.02: v2(2011.81,1544.29) 2488.39,1067.72 v2(2527.56,1067.72)
VBAT: P2.2 R14.2 | length 100.9
  Top Layer w11.81: P2.2 1763.78,774.21 R14.2
pads on no net: R12.2 U1.2 U1.3 U1.4 U1.33 U4.8 U4.12 U7.7 U7.8 U7.9 U7.10

## Polygon pours and split planes (outlines as drawn)
T3C3_O on Top Layer "Top Layer-T3C3_O" (solid, pour order 0): 2795.28,1708.66 3108.27,1708.66 3108.27,1584.65 2795.28,1584.65
T3C4_O on Top Layer "Top Layer-T3C4_O" (solid, pour order 2): 2799.21,1814.96 3106.3,1814.96 3106.3,1708.66 2799.21,1708.66
5V_MCU on Top Layer "Top Layer-5V_MCU" (solid, pour order 6): 1389.76,2397.64 1472.44,2397.64 1472.44,2314.96 1389.76,2314.96
24V on Top Layer "GND" (solid, remove dead copper, pour order 14): 0,1165.35 295.28,1165.35 295.28,1944.88 413.39,2062.99 889.76,2062.99 889.76,2110.24 759.84,2110.24 700.79,2169.29 0,2169.29
GND on Top Layer "GND" (solid, remove dead copper, pour order 34): 0,0 3149.61,0 3149.61,2363.19 3149.61,3149.61 0,3149.61
5V_MCU on Top Layer "0.3" (solid, remove dead copper, pour order 30): 460.63,1524.61 1122.05,1524.61 1122.05,1370.08 460.63,1370.08
NetC26_1 on Top Layer "0.3" (solid, remove dead copper, pour order 24): 788.39,2027.56 727.36,2027.56 645.67,1945.87 645.67,1843.5 462.6,1843.5 462.6,2051.18 660.43,2051.18 788.39,2051.18
no net on Top Layer "0.3" (solid, remove dead copper, pour order 18): 6078.74,3934.06
5V_MCU on SIGNAL "GND" (solid, remove dead copper, pour order 48): 1122.05,1488.19 956.69,1488.19 956.69,1417.32 846.46,1307.09 846.46,787.4 2720.47,787.4 2720.47,2208.66 2141.73,2208.66 2141.73,1208.66 1838.58,1208.66 1724.41,1094.49 1122.05,1094.49
5V_MCU on SIGNAL "GND" (solid, remove dead copper, pour order 46): 1385.83,1239.66
3V3 on SIGNAL "GND" (solid, remove dead copper, pour order 44): 1141.73,2138.78 1141.73,1115.16 1717.52,1115.16 1830.71,1228.35 2122.05,1228.35 2122.05,1375 2122.05,2138.78
3V3 on SIGNAL "GND" (solid, remove dead copper, pour order 32): 1240.16,1272.64
GND on AGND "GND" (solid, remove dead copper, pour order 38): 0,0 3149.61,0 3149.61,2363.19 3149.61,3149.61 0,3149.61
GND on Bottom Layer "GND" (solid, remove dead copper, pour order 40): 0,0 3149.61,0 3149.61,2363.19 3149.61,3149.61 0,3149.61

## Other copper
Top Layer:
  pour cut-out: 3011.81,688.98 2895.28,688.98 2651.18,933.07 2651.18,1131.5 2732.28,1212.6 2732.28,1405.51 2606.3,1531.5 2631.89,1557.09 2687.01,1557.09 2738.19,1608.27 2753.94,1608.27 2838.58,1523.62 3011.81,1523.62
  pour cut-out: 3011.81,2696.85 2929.13,2696.85 2614.17,2381.89 2633.86,2381.89 2720.47,2295.28 2720.47,2228.35 2822.83,2125.98 2822.83,2094.49 2870.08,2047.24 2841.54,2018.7 2841.54,1888.78 2860.24,1870.08 3011.81,1870.08
  pour cut-out: 1149.61,2759.84 1976.38,2759.84 1976.38,2593.5 1941.93,2559.06 1858.27,2559.06 1811.02,2511.81 1740.16,2511.81 1680.12,2571.85 1680.12,2552.17 1628.94,2500.98 1628.94,2481.3 1558.07,2481.3 1562.99,2476.38 1562.99,2433.07 1342.52,2433.07
  pour cut-out: 1200.79,1716.54 1200.79,1259.84 1389.76,1259.84 1389.76,1716.54
  pour cut-out: 1224.41,1236.22
  pour cut-out: 1654.25,1303.03
Bottom Layer:
  pour cut-out: 2067.42,1629.43 2035.92,1660.93 1996.55,1621.56 2030.12,1587.99

## Silkscreen, mask and mechanical layers (free items; w line width, h text height)
Top Overlay:
  pour cut-out: 2200.79,1215.55
  lines w5.91: 153.54,1377.95 192.91,1377.95 ; 173.23,870.08 173.23,909.45 ; 173.23,1358.27 173.23,1397.64
  text "T1C4" at 2681.1,2653.54 h100
  text "T1C3" at 2681.1,2535.43 h100
  text "M8" at 2011.81,2460.63 h100 r90
  text "T4C1" at 1539.37,2456.69 h100 r90
  text "M5" at 1653.54,2456.69 h100 r90
  text "M6" at 1775.59,2456.69 h100 r90
  text "M7" at 1893.7,2456.69 h100 r90
  text "T4C2" at 1417.32,2452.76 h100 r90
  text "T4C4" at 1185.04,2448.82 h100 r90
  text "T4C3" at 1303.15,2448.82 h100 r90
  text "T1C2" at 2677.17,2421.26 h100
  text "GND" at 2086.61,2334.65 h98.43
  text "T1C1" at 2677.17,2295.28 h100
  text "CLK" at 2086.61,2228.35 h98.43
  text "M1" at 2685.04,2173.23 h100
  text "DIO" at 2090.55,2129.92 h98.43
  text "M2" at 2685.04,2062.99 h100
  text "3V3" at 2090.55,2023.62 h98.43
  text "M3" at 2685.04,1948.82 h100
  text "M4" at 2681.1,1830.71 h100
  text "T3C4" at 2681.1,1720.47 h100
  text "T3C3" at 2681.1,1602.36 h100
  text "T3C2" at 2681.1,1484.25 h100
  text "T3C1" at 2681.1,1366.14 h100
  text "T2C4" at 2688.98,1251.97 h100
  text "T2C3" at 2688.98,1129.92 h100
  text "GND" at 2688.98,1011.81 h100
  text "T2C1" at 2681.1,893.7 h100
  text "OUT" at 2692.91,767.72 h100
  text "I+" at 1602.36,732.28 h98.43
  text "I-" at 1937.01,732.28 h98.43
  text "IN" at 2692.91,649.61 h100
  text "GND" at 2681.1,539.37 h78.74
  text "2020.04.22" at 1866.14,224.41 h78.74
  text "水下机器人电调控制" at 940.94,220.47 h100
Bottom Overlay:
  text "G /  /  /  /  /  /  / N /  /  /  /  /  /  / D" at 2149.61,2657.48 h100 r90
  text "G /  /  /  /  /  /  / N /  /  /  /  /  /  / D" at 2799.21,1102.36 h100
Top Solder:
  rectangle: 2799.21,1598.43 3106.3,1685.04
  rectangle: 2799.21,1716.54 3106.3,1803.15
Bottom Solder:
  rectangle: 799.21,1976.38 940.94,2149.61
Mechanical 1:
  circle w5.91: c3031.5,362.2 r68.9
  circle w5.91: c118.11,362.2 r68.9
  circle w5.91: c118.11,2854.33 r68.9
  circle w5.91: c3031.5,2854.33 r68.9
  lines w5.91: 0,287.4 ccw(c118.11,287.4) 118.11,169.29 3031.5,169.29 ccw(c3031.5,287.4) 3149.61,287.4 3149.61,2925.2 ccw(c3031.5,2925.2) 3031.5,3043.31 118.11,3043.31 ccw(c118.11,2925.2) 0,2925.2 0,287.4